# EAGLE board ExSensor (EAGLE 9.7.0)

Size 188.37 x 98.51 mm. Coordinates in mm from the lower left corner, seen from the top.
Outline: 0,0 188.37,0 188.37,98.51 0,98.51 0,0
Copper layers (1*16): Top 0.035mm / dielectric 1.5mm / Bottom 0.035mm
Design rules "default": minimum track width 6mil, minimum drill 0.35mm, track to track 6mil, track to pad 6mil, pad to pad 6mil, via to via 6mil, smd to smd 6mil, copper to edge 40mil, drill to drill 6mil, minimum pad ring 10mil, minimum via ring 8mil, stop-mask expansion 4mil, vias tented up to drill 0mil, thermal gap 10mil

## Footprints (pad centres in the part's own frame; a part is rotated, then mirrored left to right if it is on the bottom)
LEDRD254W60D565H860B_G = drill 0.981 pad 1.581: 1 -1.27,0; 2 1.27,0
28027 = drill 1.016 long: 1 -2.54,0; 2 0,0; 3 2.54,0
RESAD1016W63L850D250B = drill 0.83 pad 1.43: 1 -5.08,0; 2 5.08,0
ARDUINO-UNO-R3-SHIELD = drill 1.016 pad 1.88: 3.3V 24.13,-2.54; 5V 24.13,0; A0 24.13,12.7; A1 24.13,15.24; A2 24.13,17.78; A3 24.13,20.32; A4 24.13,22.86; A5 24.13,25.4; AREF -24.13,-13.97; D2 -24.13,20.32; D3 -24.13,17.78; D4 -24.13,15.24; D5 -24.13,12.7; D6 -24.13,10.16; D7 -24.13,7.62; D8 -24.13,3.81; D9 -24.13,1.27; D10 -24.13,-1.27; D11 -24.13,-3.81; D12 -24.13,-6.35; D13 -24.13,-8.89; GND@0 24.13,2.54; GND@1 24.13,5.08; GND@2 -24.13,-11.43; IOREF 24.13,-7.62; NC 24.13,-10.16; RES 24.13,-5.08; RX -24.13,25.4; SCL -24.13,-19.05; SDA -24.13,-16.51; TX -24.13,22.86; VIN 24.13,7.62
JHD-162A = drill 1.016 long: 1 -19.05,0; 2 -16.51,0; 3 -13.97,0; 4 -11.43,0; 5 -8.89,0; 6 -6.35,0; 7 -3.81,0; 8 -1.27,0; 9 1.27,0; 10 3.81,0; 11 6.35,0; 12 8.89,0; 13 11.43,0; 14 13.97,0; 15 16.51,0; 16 19.05,0

## Placement (x,y rotation side)
D1  GREEN  [LEDRD254W60D565H860B_G]  158.15,56.82 180 top
PIR1  PIR-SENSOR_28027  [28027]  108.62,77.14 0 top
R1  1k  [RESAD1016W63L850D250B]  159.42,69.52 90 top
R3  220  [RESAD1016W63L850D250B]  151.8,84.76 270 top
U2  ARDUINO-UNO-R3-SHIELD  [ARDUINO-UNO-R3-SHIELD]  47.88,68.67 270 top
U5  LCD-16X2JHD-162A  [JHD-162A]  132.75,36.63 0 top

## Library data of the parts
D1 = Tinkercad; CATEGORY: Opto-Electronic; SUB-CATEGORY: LED; VALUE: LED_GREEN
PIR1 R1 R3 U2 U5 = Tinkercad

## Nets
D1_A: D1.1 R1.1
U2_5V: PIR1.2 R3.1 U2.5V U5.2
U2_D2: U2.D2 U5.14
U2_D3: U2.D3 U5.13
U2_D4: U2.D4 U5.12
U2_D5: U2.D5 U5.11
U2_D9: PIR1.1 U2.D9
U2_D10: R1.2 U2.D10
U2_D11: U2.D11 U5.6
U2_D12: U2.D12 U5.4
U2_GND: D1.2 PIR1.3 U2.GND@0 U2.GND@1 U2.GND@2 U5.1 U5.3 U5.5 U5.16
U5_LED+: R3.2 U5.15

## Tracks (layer width: path | path; a pad name or v marks a point on that pad's centre or on a via)
D1_A  (1 unrouted)
U2_5V  (3 unrouted)
U2_D2  (1 unrouted)
U2_D3  (1 unrouted)
U2_D4  (1 unrouted)
U2_D5  (1 unrouted)
U2_D9  (1 unrouted)
U2_D10  (1 unrouted)
U2_D11  (1 unrouted)
U2_D12  (1 unrouted)
U2_GND  (8 unrouted)
U5_LED+  (1 unrouted)